# Altium PCB PCB robot V3.PCBDOC (part 1 of 3)
Units mm, origin at the board's own origin, x right, y up, seen from the top; angles counter-clockwise.
Board outline 299.72 x 199.9 mm, 2 copper layers (Top Layer, Bottom Layer); 127 components, 116 nets, 527 pads, 274 vias.
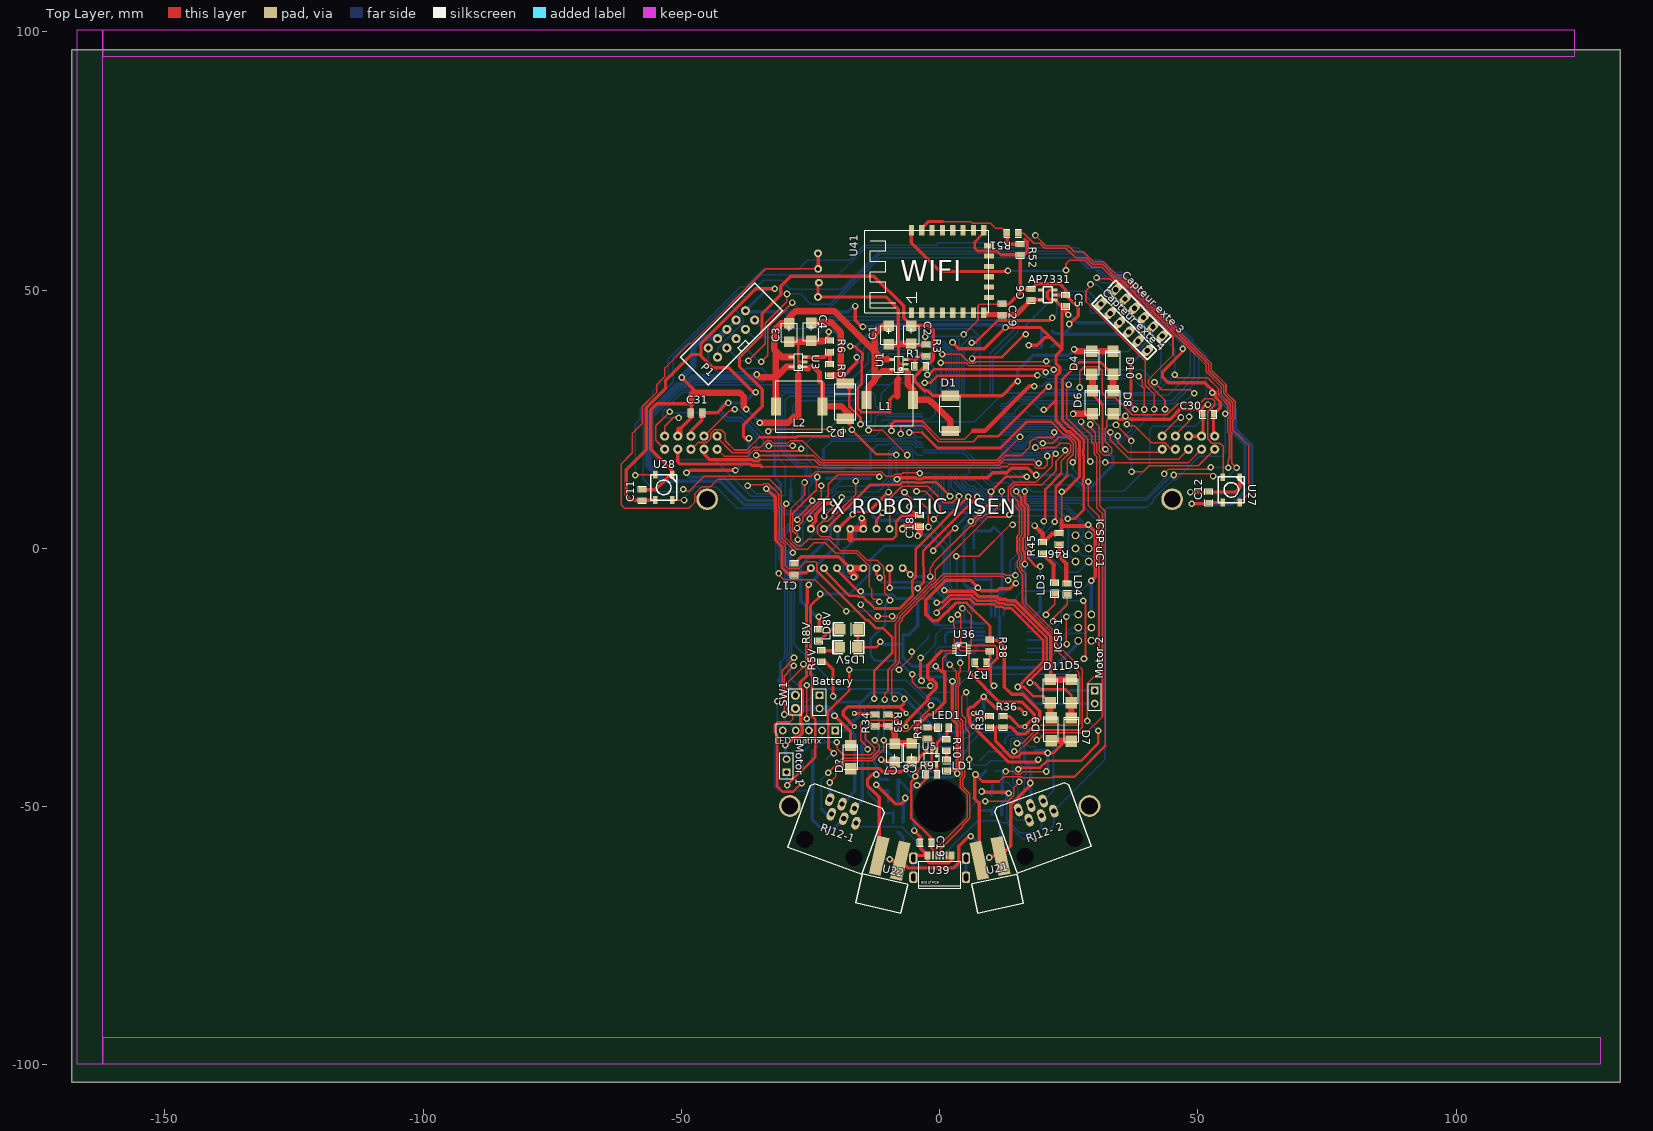
[diagram p0: Top Layer view]
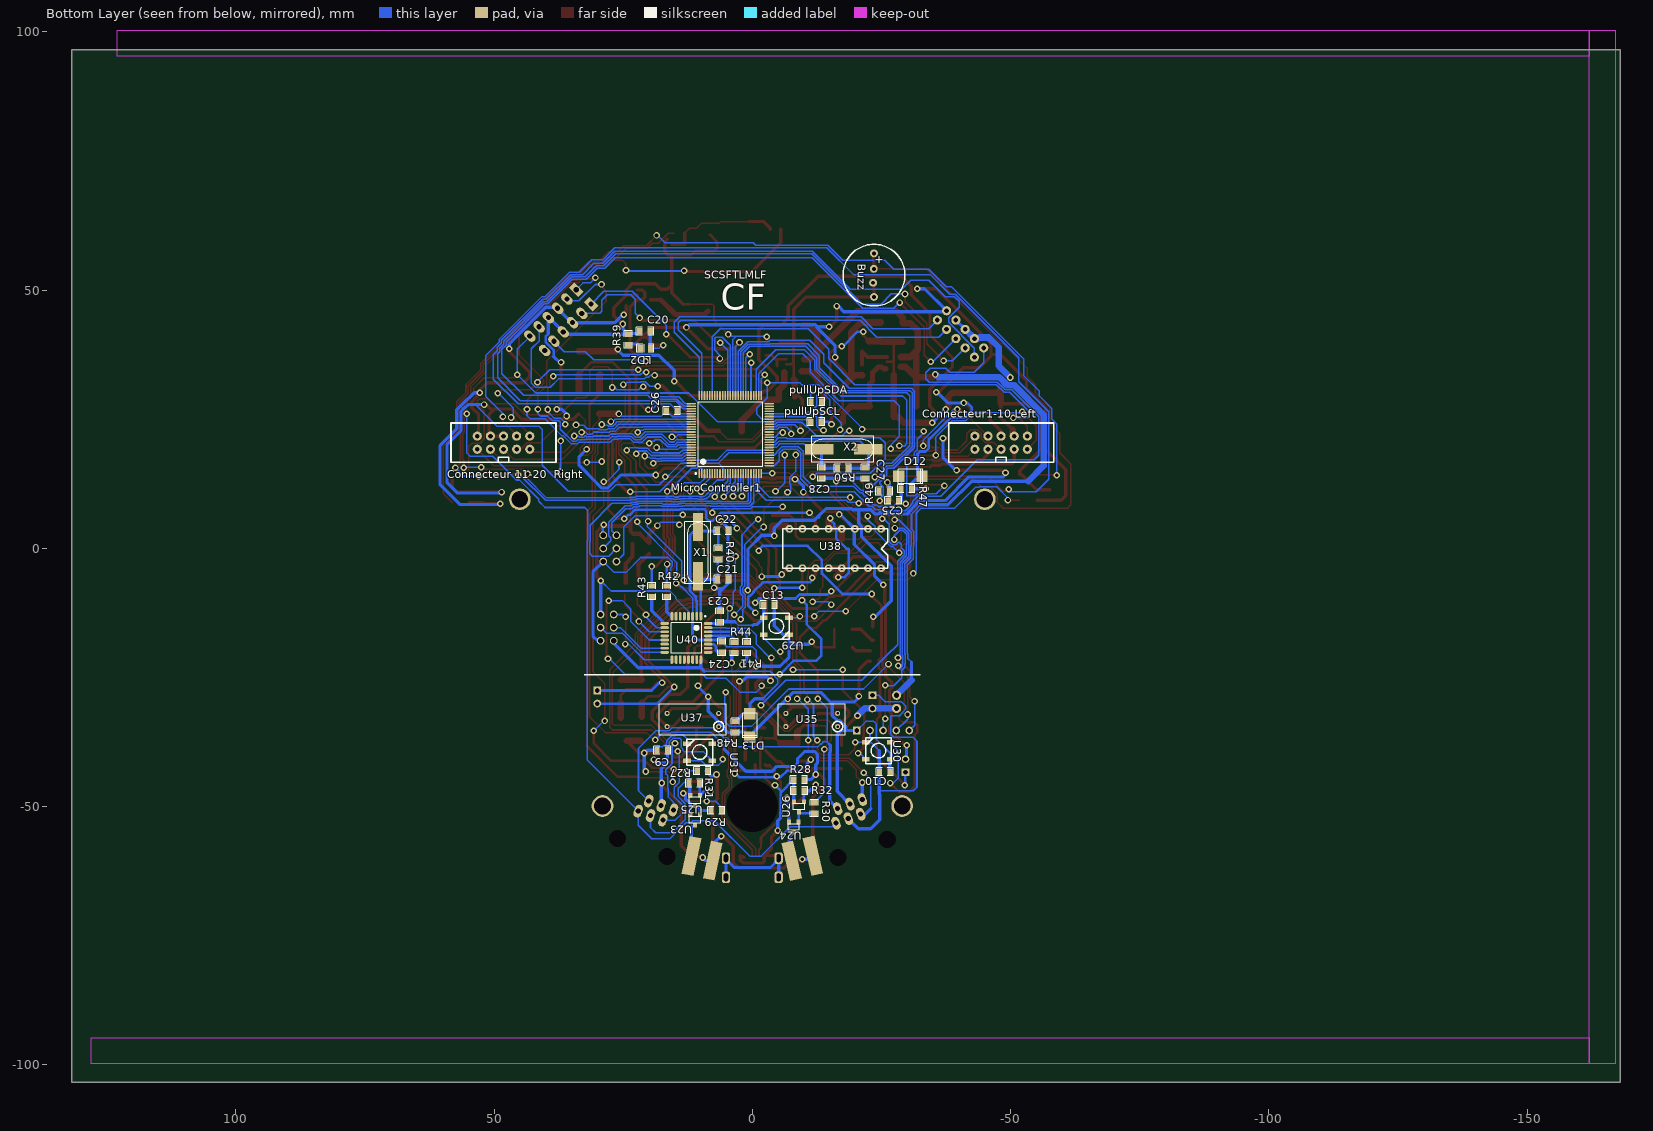
[diagram p1: Bottom Layer view, seen from below]

## Layer stack, top to bottom
Top Solder: solder mask 0.0102, Solder Resist, Dk 3.5
Top Layer: signal copper 0.0356
Dielectric1: dielectric 0.32, FR-4, Dk 4.8
Bottom Layer: signal copper 0.0356
Bottom Solder: solder mask 0.0102, Solder Resist, Dk 3.5

## Board outline
-167.997,-103.403 131.723,-103.403 131.723,96.495 -167.997,96.495

## Design rules (kind name [scope] priority, off if disabled: settings)
Clearance Clearance_bottom_polygon [OnLayer('Bottom Layer') Or OnLayer('Multi-Layer') vs OnLayer('Bottom Layer')  And  InPoly] p1: gap=0.508
Clearance Clearance_top_polygon [OnLayer('Top Layer')  Or OnLayer('Multi-Layer') vs OnLayer('Top Layer') And InPoly] p2: gap=0.508
Clearance Clearance_bottom [OnLayer('Bottom Layer') Or OnLayer('Multi-Layer') vs OnLayer('Bottom Layer')  And Not InPoly] p3: gap=0.19
Clearance Clearance_top [OnLayer('Top Layer')  Or OnLayer('Multi-Layer') vs OnLayer('Top Layer') And Not InPoly] p4: gap=0.192
Clearance Clearance_pad_to_pad [OnLayer('Multi-Layer') vs OnLayer('Multi-Layer')] p5: gap=0.254
ComponentClearance ComponentClearance_bottom [OnLayer('Bottom Overlay') vs OnLayer('Bottom Overlay')] p1: gap=0 collisioncheckmode=3 verticalgap=0.254 showdistances=FALSE
ComponentClearance ComponentClearance_top [OnLayer('Top Overlay') vs OnLayer('Top Overlay')] p2: gap=0 collisioncheckmode=3 verticalgap=0.254 showdistances=FALSE
DiffPairsRouting [All] p1: maxlimit=0.254 minlimit=0.1 mostfreqgap=0.254 toplayer_minwidth=0.381 toplayer_maxwidth=0.381 toplayer_prefwidth=0.381 bottomlayer_minwidth=0.381 bottomlayer_maxwidth=0.381 bottomlayer_prefwidth=0.381 maxuncoupledlength=12.7
FabricationTestPointUsage TestPointUsage [All] p1: valid=0 allowmultiple=FALSE
FabricationTestpoint Testpoint [All] p1: side=3 testpointundercomponent=TRUE minsize=1.016 maxsize=2.54 preferedsize=1.524 minholesize=0 maxholesize=1.016 preferedholesize=0.813 testpointgrid=0.025 allowsidetop=TRUE allowsidebottom=TRUE usegrid=TRUE gridtolerance=0
HoleSize [All] p1: absolutevalues=TRUE maxlimit=25.4 minlimit=0.406 maxpercent=80.000 minpercent=20.000
MinimumAnnularRing [PadXSize_AllLayers = PadYSize_AllLayers] p1: minimumring=0.203
PermittedLayers [All] p1: toplayerpermitted=TRUE bottomlayerpermitted=TRUE
PolygonConnect [All] p1: connectstyle=Relief reliefconductorwidth=0.61 reliefentries=4 polygonreliefangle="90 Angle" airgapwidth=0.254
RoutingVias [All] p1: holewidth=0.406 width=0.813 viastyle="Through Hole" minholewidth=0.4 minwidth=0.8 maxholewidth=0.6 maxwidth=10
SMDToPlane [All] p1: distance=0
SolderMaskExpansion [All] p1: expansion=0.102
ViasUnderSMD [All] p1: allowed=FALSE
Width Width_botom_top [OnLayer('Bottom Layer') or OnLayer('Top Layer')] p1: maxlimit=254 minlimit=0.254 preferedwidth=0.813 minimp=50.000000 maximp=50.000000 favimp=50.000000
24 further rules are at their usual default settings.

## Classes and differential pairs
component class "MKbloc Connector": "Capteur exte 3" "Capteur exte 4" RJ12-1 RJ12-2
component class "Line driver connector": C30 C31 Connecteur1-10 "Connecteur1-10 Left" "Connecteur 11-20  Right"
component class TXRobot-Boutons: ButtonCo1 P1
component class "Sound Connector": Buzz
component class "LED Matrix connector": "LED matrix"
component class "IA Core": C19 C20 C21 C22 C23 C24 C25 C26 C27 C28 D12 D13 "ICSP 1" "ICSP uC1" LD2 LD3 LD4 MicroController1 pullUpSCL pullUpSDA R39 R40 R41 R42 R43 R44 R45 R46 R47 R48 R49 R50 U39 U40 X1 X2
component class "CarteTxCapteurDistance 2": Analog C9 C10 C11 C12 C13 Digital infrared1 infrared2 infrared3 infrared4 infrared5 infrared6 "Infrared 1" LedRgbWs2812b1 LedRgbWs2812b2 LedRgbWs2812b3 LedRgbWs2812b4 LedRgbWs2812b5 LedRgbWs2812b6 LedRgbWs2812b7 LedRgbWs2812b8 LedRgbWs2812b9 LedRgbWs2812b10 Q1 Q2 Q3 Q4 Q5 Q6 Q7 Q8 Q9 Q10 Q11 R27 R28 R29 R30 R31 R32 U22 U23 U24 U25 U26 U27 U28 U29 U30 U31
component class "Alim sch projet robot": AP7331 Battery C1 C2 C3 C4 C5 C6 D1 D2 D? L1 L2 LD5V LD8V R1 R3 R5 R5V R6 R8V "REG 5V" "REG 8V" SW1 U1 U3
component class "Schema chargeur USB projet robot": C7 C8 LD1 LED1 R9 R10 R11 U5
component class CarteTxMoteur: C17 C18 D4 D5 D6 D7 D8 D9 D10 D11 "Motor 1" "Motor 2" R33 R34 R35 R36 R37 R38 U35 U36 U37 U38
component class "Wi fi connector": C29 R51 R52 U41

## Components (designator, comment, footprint, x,y, rotation, side; value= is the part's Value field where it differs from the comment)
AP7331 "AP7331" AP7331 20.901,49.047 r90 top (schematic designator "AP7331 voltage regulator")
Battery "Header 2" HDR1X2 -23.256,-28.46 r270 top (schematic designator "Battery pins1")
Buzz "BuzzerChinois" BuzzerChinois -23.551,52.885 r270 bottom
C1 "CAP_POL" 293D/B -9.843,43.074 r270 top
C2 "CAP_POL" 293D/B -5.478,43.119 r270 top
C3 "CAP_POL" 293D/B -29.114,43.569 r270 top
C4 "CAP_POL" 293D/B -24.894,43.709 r270 top
C5 "CAP" 0805 24.399,46.938 r90 top
C6 "CAP" 0805 17.737,50.133 r270 top
C7 "CAP_POL" 293D/B -8.728,-41.37 r90 top
C8 "CAP_POL" 293D/B -5.439,-41.321 r90 top
C9 "CAP" 0805 16.432,-39.095 r0 bottom
C10 "CAP" 0805 -26.633,-43.257 r0 bottom
C11 "CAP" 0805 -57.57,9.32 r90 top
C12 "CAP" 0805 52.08,8.855 r90 top
C13 "CAP" 0805 -2.197,-10.927 r180 bottom
C17 "CAP" 0805 -28.15,-2.987 r270 top
C18 "CAP" 0805 -3.83,4.32 r90 top
C19 "CAP" 0805 -3.726,-56.951 r0 top
C20 "CAP" 0805 19.761,42.053 r0 bottom
C21 "CAP" 0805 6.719,-5.983 r180 bottom
C22 "CAP" 0805 6.719,3.361 r180 bottom
C23 "CAP" 0805 6.28,-12.19 r270 bottom
C24 "CAP" 0805 5.915,-18.081 r270 bottom
C25 "CAP" 0805 -28.336,9.249 r0 bottom
C26 "CAP" 0805 14.56,26.621 r0 bottom
C27 "CAP" 0805 -21.895,15.604 r270 bottom
C28 "CAP" 0805 -13.403,15.604 r270 bottom
C29 "CAP" 0805 12.108,45.239 r90 top
C30 "CAP" 0805 52.987,25.919 r180 top
C31 "CAP" 0805 -46.04,26.25 r180 top
"Capteur exte 3" "headers6" Headers6 38.579,45.571 r45 top
"Capteur exte 4" "headers6" Headers6 35.702,42.788 r45 top
"Connecteur1-10 Left" "comment" HE10-10V -43.08,19.18 r90 bottom locked
"Connecteur 11-20  Right" "comment" HE10-10V 53.24,19.18 r90 bottom locked
D1 "SS32" "Schottly Diode SS32 footprint" 2.007,29.524 r0 top
D2 "SS32" "Schottly Diode SS32 footprint" -18.28,31.893 r0 top
D4 "DiodeRedresseuse" "Diode MULTICOMP SS16" 29.47,35.93 r90 top
D5 "DiodeRedresseuse" "Diode MULTICOMP SS16" 25.44,-27.655 r90 top
D6 "DiodeRedresseuse" "Diode MULTICOMP SS16" 29.58,28.27 r90 top
D7 "DiodeRedresseuse" "Diode MULTICOMP SS16" 25.505,-35.09 r90 top
D8 "DiodeRedresseuse" "Diode MULTICOMP SS16" 33.58,28.27 r90 top
D9 "DiodeRedresseuse" "Diode MULTICOMP SS16" 21.59,-35.015 r90 top
D10 "DiodeRedresseuse" "Diode MULTICOMP SS16" 33.545,35.915 r90 top
D11 "DiodeRedresseuse" "Diode MULTICOMP SS16" 21.44,-27.655 r90 top
D12 "DiodeRedresseuse" "Diode MULTICOMP SS16" -30.61,13.945 r180 bottom
D13 "DiodeRedresseuse" "Diode MULTICOMP SS16" 0.461,-34.306 r270 bottom
D? "DiodeRedresseuse" "Diode MULTICOMP SS16" -17.257,-40.426 r90 top
"ICSP 1" "ISCP Arduino" "Prog Arduino" 26.821,-12.806 r0 top
"ICSP uC1" "ISCP Arduino" "Prog Arduino" 26.307,2.519 r0 top
L1 "IND" 1050 -14.152,28.727 r90 top
L2 "IND" 1050 -31.698,27.479 r90 top
LD1 "comment" LED0805 1.375,-40.939 r270 top
LD2 "Yellow" LED0805 21.71,38.765 r180 bottom
LD3 "Yellow" LED0805 22.255,-8.798 r90 top
LD4 "Yellow" LED0805 24.659,-8.9 r90 top
LD5V "comment" LED1206 -15.958,-19.15 r180 top
LD8V "comment" LED1206 -15.851,-15.642 r180 top
LED1 "comment" LED0805 -0.369,-34.694 r0 top
"LED matrix" "Header 5" HDR1X5 -20.236,-35.259 r180 top (schematic designator "To LED Matrix1")
MicroController1 "ATmega2560-16AU" 100A_N 4.255,22.022 r90 bottom
"Motor 1" "Header 2" HDR1X2 -29.65,-43.35 r90 top
"Motor 2" "Header 2" HDR1X2 30.001,-27.514 r270 top
P1 "comment" HE10-10V -43,37 r135 top
pullUpSCL "RES" 0805 -13.341,24.526 r0 bottom
pullUpSDA "RES" 0805 -13.409,28.362 r0 bottom
R1 "RES" 0805 -4.783,35.301 r0 top
R3 "RES" 0805 -2.604,39.376 r270 top
R5 "RES" 0805 -21.258,35.564 r270 top
R5V "RES" 0805 -22.869,-19.806 r270 top
R6 "RES" 0805 -21.308,40.129 r270 top
R8V "RES" 0805 -23.407,-17.791 r90 top
R9 "RES" 0805 -0.594,-43.695 r180 top
R10 "RES" 0805 1.319,-39.082 r90 top
R11 "RES" 0805 -2.394,-34.751 r270 top
R27 "RES" 0805 8.648,-43.069 r0 bottom
R28 "RES" 0805 -10.038,-44.766 r0 bottom
R29 "RES" 0805 5.966,-50.75 r0 bottom
R30 "RES" 0805 -11.991,-49.275 r270 bottom
R31 "RES" 0805 12.268,-45.453 r180 bottom
R32 "RES" 0805 -8.04,-46.951 r180 bottom
R33 "RES" 0805 -9.98,-34.28 r90 top
R34 "RES" 0805 -12.475,-34.28 r90 top
R35 "RES" 0805 9.665,-34.605 r90 top
R36 "RES" 0805 12.33,-34.6 r90 top
R37 "RES" 0805 8.94,-22.095 r180 top
R38 "RES" 0805 9.738,-17.771 r270 top
R39 "RES" 0805 23.995,39.405 r90 bottom
R40 "RES" 0805 6.595,-2.053 r90 bottom
R41 "RES" 0805 1.1,-18.159 r270 bottom
R42 "RES" 0805 16.567,-9.328 r90 bottom
R43 "RES" 0805 19.46,-9.328 r90 bottom
R44 "RES" 0805 3.527,-20.193 r90 bottom
R45 "RES" 0805 19.951,-0.927 r90 top
R46 "RES" 0805 23.17,0.848 r90 top
R47 "RES" 0805 -28.807,11.498 r180 bottom
R48 "RES" 0805 3.268,-33.54 r270 bottom
R49 "RES" 0805 -24.516,11.057 r180 bottom
R50 "RES" 0805 -16.515,15.477 r180 bottom
R51 "RES" 0805 15.119,61.018 r180 top
R52 "RES" 0805 15.601,58.85 r270 top
RJ12-1 "RJ12_1" RJ12_Femelle_FCI -21.351,-58.081 r340 top (schematic designator "Capteur exte 1")
"RJ12- 2" "RJ12_FCI_Femelle" RJ12_Femelle_FCI 21.281,-57.919 r20 top (schematic designator "Capteur exte 2")
SW1 "allumage" JMP2-100 -27.927,-30.986 r90 top
U1 "LM2731" "LM2731 footprint" -6.553,34.679 r270 top
U3 "LM2731" "LM2731 footprint" -26.043,35.134 r270 top
U5 "MCP73831" MCP73831 -0.589,-39.063 r180 top
U21 "infrared" Infrared 9.72,-60 r192 top
U22 "infrared" Infrared -9.671,-60 r167 top
U23 "Transistors" BC817-40 11.074,-52.6 r180 bottom
U24 "Transistors" BC817-40 -8.027,-53.988 r180 bottom
U25 "Transistors" BC817-40 11.064,-48.82 r180 bottom
U26 "Transistors" BC817-40 -9.045,-50.049 r180 bottom
U27 "LedRgbWs2812b" LedRgbWs2812b 56.45,11.315 r90 top
U28 "LedRgbWs2812b" LedRgbWs2812b -53.425,11.79 r90 top
U29 "LedRgbWs2812b" LedRgbWs2812b -4.657,-15.072 r180 bottom
U30 "LedRgbWs2812b" LedRgbWs2812b -24.422,-39.165 r0 bottom
U31 "LedRgbWs2812b" LedRgbWs2812b 10.185,-39.462 r0 bottom
U35 "ITR9608" "ITR9608 footprint" -11.5,-33.2 r0 bottom locked
U36 "MCP6002" MCP6002 2.78,-18.81 r0 top
U37 "ITR9608" "ITR9608 footprint" 11.5,-33.2 r0 bottom locked
U38 "L293NE" L293NE -24.94,-3.845 r270 bottom
U39 "USB microB" "USB micro B connector" 0,-62.782 r0 top
U40 "ATmega16U2-AU" 32A_N 12.758,-17.345 r270 bottom
U41 "ESP8266MOD" "ESP8266MOD Footprint" -5.462,45.58 r90 top
X1 "16MHz" HC-49S-SMD 10.509,-5.38 r90 bottom
X2 "16MHz" HC-49S-SMD -12.973,19.158 r180 bottom

## Footprints (in the part's own frame and the unit in brackets; to place one, negate y for a bottom-side part, rotate by r counter-clockwise, add the part's x,y. Pads: shape width x height; smd on the part's side, far side on the other; paste and mask are expansions set on the pad)
32A_N [mm] "Thin QFP, 32-Leads, Body 7x7mm, Pitch 0.8mm, IPC Medium Density"
  oval 1.65x0.55 smd: 1(-4.2,2.8) 2(-4.2,2) 3(-4.2,1.2) 4(-4.2,0.4) 5(-4.2,-0.4) 6(-4.2,-1.2) 7(-4.2,-2) 8(-4.2,-2.8) 17(4.2,-2.8) 18(4.2,-2) 19(4.2,-1.2) 20(4.2,-0.4) 21(4.2,0.4) 22(4.2,1.2) 23(4.2,2) 24(4.2,2.8)
  oval 0.55x1.65 smd: 9(-2.8,-4.2) 10(-2,-4.2) 11(-1.2,-4.2) 12(-0.4,-4.2) 13(0.4,-4.2) 14(1.2,-4.2) 15(2,-4.2) 16(2.8,-4.2) 25(2.8,4.2) 26(2,4.2) 27(1.2,4.2) 28(0.4,4.2) 29(-0.4,4.2) 30(-1.2,4.2) 31(-2,4.2) 32(-2.8,4.2)
  silkscreen extent -4.32,-2.95 2.95,3.75, body extent -3.5,-3.5 3.5,3.5, height 1.2
100A_N [mm] "Thin QFP, 100-Leads, Body 14x14mm, Pitch 0.5mm, IPC Medium Density"
  oval 1.8x0.3 smd: 1(-7.55,6) 2(-7.55,5.5) 3(-7.55,5) 4(-7.55,4.5) 5(-7.55,4) 6(-7.55,3.5) 7(-7.55,3) 8(-7.55,2.5) 9(-7.55,2) 10(-7.55,1.5) 11(-7.55,1) 12(-7.55,0.5) 13(-7.55,0) 14(-7.55,-0.5) 15(-7.55,-1) 16(-7.55,-1.5) 17(-7.55,-2) 18(-7.55,-2.5) 19(-7.55,-3) 20(-7.55,-3.5) 21(-7.55,-4) 22(-7.55,-4.5) 23(-7.55,-5) 24(-7.55,-5.5) 25(-7.55,-6) 51(7.55,-6) 52(7.55,-5.5) 53(7.55,-5) 54(7.55,-4.5) 55(7.55,-4) 56(7.55,-3.5) 57(7.55,-3) 58(7.55,-2.5) 59(7.55,-2) 60(7.55,-1.5) 61(7.55,-1) 62(7.55,-0.5) 63(7.55,0) 64(7.55,0.5) 65(7.55,1) 66(7.55,1.5) 67(7.55,2) 68(7.55,2.5) 69(7.55,3) 70(7.55,3.5) 71(7.55,4) 72(7.55,4.5) 73(7.55,5) 74(7.55,5.5) 75(7.55,6)
  oval 0.3x1.8 smd: 26(-6,-7.55) 27(-5.5,-7.55) 28(-5,-7.55) 29(-4.5,-7.55) 30(-4,-7.55) 31(-3.5,-7.55) 32(-3,-7.55) 33(-2.5,-7.55) 34(-2,-7.55) 35(-1.5,-7.55) 36(-1,-7.55) 37(-0.5,-7.55) 38(0,-7.55) 39(0.5,-7.55) 40(1,-7.55) 41(1.5,-7.55) 42(2,-7.55) 43(2.5,-7.55) 44(3,-7.55) 45(3.5,-7.55) 46(4,-7.55) 47(4.5,-7.55) 48(5,-7.55) 49(5.5,-7.55) 50(6,-7.55) 76(6,7.55) 77(5.5,7.55) 78(5,7.55) 79(4.5,7.55) 80(4,7.55) 81(3.5,7.55) 82(3,7.55) 83(2.5,7.55) 84(2,7.55) 85(1.5,7.55) 86(1,7.55) 87(0.5,7.55) 88(0,7.55) 89(-0.5,7.55) 90(-1,7.55) 91(-1.5,7.55) 92(-2,7.55) 93(-2.5,7.55) 94(-3,7.55) 95(-3.5,7.55) 96(-4,7.55) 97(-4.5,7.55) 98(-5,7.55) 99(-5.5,7.55) 100(-6,7.55)
  silkscreen extent -7.67,-6.25 6.25,6.83, body extent -7,-7 7,7, height 1.2
293D/B [mil]
  rect 80x80 smd: 1(0,0) 2(140,0)
  silkscreen extent 0,-60 140,60
0805 [mil]
  rect 40x50 smd: 1(0,0) 2(80,0)
  silkscreen extent -25,-30 105,30
1050 [mm]
  rect 3.5x2 smd paste+0 mask+1: 1(0,0) 2(0,-9)
  silkscreen extent -5,-9 5,0
AP7331 [mm]
  rect 0.6x1.1 smd: 1(-0.95,-1.35) 2(0,-1.35) 3(0.95,-1.35) 4(0.95,1.35) 5(-0.95,1.35)
  silkscreen extent -1.55,-0.85 1.55,0.85
BC817-40 [mm]
  rect 0.8x0.9 smd: 1(0.95,1) 2(-0.95,1) 3(0,-1)
  silkscreen extent -1.1,-0.6 1.1,0.6
BuzzerChinois [mil]
  round 60 hole 31.5: 0(-166.14,0)
  round 60 hole 30: 1(166.14,0)
  silkscreen extent -235,-235 235,235
"Diode MULTICOMP SS16" [mm]
  rect 2.2x2.21 smd: 1(-2.25,0) 2(2.25,0)
  silkscreen extent -2.37,-1.4 2.37,1.4
"ESP8266MOD Footprint" [mm]
  rect 2x1 smd paste+0 mask+0.05: 1(0,0) 2(0,-2) 3(0,-4) 4(0,-6) 5(0,-8) 6(0,-10) 7(0,-12) 8(0,-14) 15(16,-14) 16(16,-12) 17(16,-10) 18(16,-8) 19(16,-6) 20(16,-4) 21(16,-2) 22(16,0)
  rect 1x2 smd paste+0 mask+0.05: 9(3,-15) 10(5,-15) 11(7,-15) 12(9,-15) 13(11,-15) 14(13,-15)
  silkscreen extent 0,-15 16,9
HC-49S-SMD [mm] "SMD quartz crystal"
  rect 5.5x2 smd: 1(0,0) 2(9.5,0)
  silkscreen extent -1.5,-2.48 10.5,2.52
HDR1X2 [mm] "Connector; Header; 2 Position"
  rect 1.5x1.5 hole 0.9: 1(0,0)
  round 1.5 hole 0.9: 2(2.54,0)
  silkscreen extent -1.27,-1.27 3.81,1.27
HDR1X5 [mm] "Connector; Header; 5 Position"
  rect 1.5x1.5 hole 0.9: 1(0,0)
  round 1.5 hole 0.9: 2(2.54,0) 3(5.08,0) 4(7.62,0) 5(10.16,0)
  silkscreen extent -1.27,-1.27 11.43,1.27
HE10-10V [mil]
  round 70 hole 36: 1(0,0) 2(100,0) 3(0,-100) 4(100,-100) 5(0,-200) 6(100,-200) 7(0,-300) 8(100,-300) 9(0,-400) 10(100,-400)
  silkscreen extent -100,-600 200,200
Headers6 [mm]
  rect 2.524x1.524 hole 1: 1(0,6.35)
  oval 2.524x1.524 hole 1: 2(0,3.81) 3(0,1.27) 4(0,-1.27) 5(0,-3.81) 6(0,-6.35)
  silkscreen extent -1.27,-7.62 1.27,7.62
Infrared [mm]
  rect 2.3x7.5 smd far side: gndEmitter(-2.1,0) VCC(2.1,0)
  rect 2.3x7.5 smd: gndReceiver(2.1,0) VCC(-2.1,0)
  silkscreen extent -4.5,4.1 4.5,9.9
"ITR9608 footprint" [mm]
  round 1 hole 0.5 paste+0 mask+0.05: 1(-5,1.3) 2(-5,-1.24) 3(5,-1.24) 4(5,1.3)
  silkscreen extent -6.5,-3 6.5,3
JMP2-100 [mil]
  round 70 hole 40: 1(0,0) 2(100,0)
  silkscreen extent -50,-50 150,50
L293NE [mil]
  round 60 hole 30: 1(-300,0) 2(-300,-100) 3(-300,-200) 4(-300,-300) 5(-300,-400) 6(-300,-500) 7(-300,-600) 8(-300,-700) 9(0,0) 10(0,-100) 11(0,-200) 12(0,-300) 13(0,-400) 14(0,-500) 15(0,-600) 16(0,-700)
  silkscreen extent -300,-750 0,50
LED0805 [mil]
  rect 40x50 smd: A(80,0) K(0,0)
  silkscreen extent -25,-30 105,30
LED1206 [mil]
  rect 80x80 smd: A(135,0) K(0,0)
  silkscreen extent -50,-50 185,50
LedRgbWs2812b [mm]
  rect 1.5x0.9 smd: din(2.45,1.65) dout(-2.45,-1.65) GND(2.45,-1.65) VCC(-2.45,1.65)
  silkscreen extent -2.5,-2.5 2.5,2.5
"LM2731 footprint" [mm]
  rect 0.55x1 smd paste+0 mask+0.05: 1(0,0) 2(-0.95,0) 3(-1.9,0) 4(-1.9,-2.7) 5(0,-2.7)
  silkscreen extent -2.54,-2.16 0.64,-0.51
MCP6002 [mm]
  rect 0.75x0.3 smd paste+0 mask+0.05: 1(0,0) 2(0,-0.5) 3(0,-1) 4(0,-1.5) 5(2.9,-1.5) 6(2.9,-1) 7(2.9,-0.5) 8(2.9,0)
  silkscreen extent 0.4,-1.9 2.5,0.5
MCP73831 [mm]
  rect 0.6x1.1 smd paste+0 mask+0.05: 1(0,0) 2(0.95,0) 3(1.9,0) 4(1.9,2.8) 5(0,2.8)
  silkscreen extent -0.51,0.63 2.41,2.16
"Prog Arduino" [mm]
  round 1.5 hole 1 paste+0 mask+0.05: 1(0,0) 2(2.54,0) 3(0,-2.54) 4(2.54,-2.54) 5(0,-5.08) 6(2.54,-5.08)
RJ12_Femelle_FCI [mm]
  oval 1.524x2.524 hole 1: 1(-3.17,8.89) 2(-1.91,6.35) 3(-0.63,8.89) 4(0.63,6.35) 5(1.91,8.89) 6(3.17,6.35)
  round 0 hole 3.3: ""(-5.08,0) ""(5.08,0)
  silkscreen extent -7.62,-2.54 7.62,10.8
"Schottly Diode SS32 footprint" [mm]
  rect 3.39x1.96 smd paste+0 mask+0.05: 1(0,0) 2(0,-6.81)
  silkscreen extent -2,-7 2,0
"USB micro B connector" [mm]
  rect 0.4x1.5 smd paste+0 mask+0.05: 1(-1.3,3.302) 2(-0.65,3.302) 3(0,3.302) 4(0.65,3.302) 5(1.3,3.302)
  rrect50% 1.6x2.2 hole 0.8 slot 1.5 at 90 deg paste+0 mask+0.05: 6(-5.1,2.794) 7(-5.1,-0.906) 8(5.1,-0.906) 9(5.1,2.794)
  rect 1.15x1.5 smd paste+0 mask+0.05: 10(-2.325,3.302) 11(2.325,3.302)
  silkscreen extent -4.08,-3.05 4.04,2.16

## Part data
Battery "Motor 1" "Motor 2": "Header, 2-Pin"
C1 C2 C3 C4 C7 C8: "capacité polarisée"
C5 C6 C9 C10 C11 C12 C13 C17 C18 C19 C20 C21 C22 C23 C24 C25 C26 C27 C28 C29 C30 C31: "capacité non polarisée"
"Connecteur1-10 Left" "Connecteur 11-20  Right" P1: library part HE10-10, "10-pin connector"
D1 D2: "Schottky Diode 20V 3A"
"ICSP 1" "ICSP uC1": "Programmation Port For Arduino"
L1 L2: library part "Shielded inductor", "Shielded Inductor 1050"
LD1 LD2 LD3 LD4 LD5V LD8V LED1: library part LED, "LED 5mm/3mm/CMS"
"LED matrix": "Header, 5-Pin"
MicroController1: "8-bit AVR Microcontroller, 4.5-5.5V, 256KB Flash, 4KB EEPROM, 8KB SRAM, 86 GPIO pins, 100-pin TQFP, Industrial Grade (-40°C to 85°C), Pb-Free"
pullUpSCL pullUpSDA R1 R3 R5 R5V R6 R8V R9 R10 R11 R27 R28 R29 R30 R31 R32 R33 R34 R35 R36 R37 R38 R39 R40 R41 R42 R43 R44 R45 R46 R47 R48 R49 R50 R51 R52: "resistance"
RJ12-1: library part RJ12_FCI_Femelle
SW1: library part JUMPER2, "cavalier 1 position"
U1 U3: "Boost switch regulator DCDC"
U5: "Voltage regulator for Li-po or li-ion battery, USB compatible"
U21 U22: library part RPR-359F
U23 U24 U25 U26: "NPN transistor"
U35 U37: "Intersection sensor"
U36: "Double Operational Amplifier"
U39: "Usb female connector SMD micro B"
U40: "8-bit AVR Microcontroller, 2.7-5.5V, 16KB Flash, 512 Bytes EEPROM, 512 Bytes SRAM, 32-pin TQFP, Industrial Grade (-40°C to 85°C)"
U41: "Wi fi ESP"
X1 X2: library part XTAL, "Quartz"

## Free pads (board coordinates)
  round 1.524 hole 0.762: 0(-23.515,54.103) 1(-23.389,51.405)
  round 4.2 hole 3.2: ""(-45,9.5) ""(-29,-49.88) ""(29,-49.88) ""(45,9.5)
  round 0 hole 10: ""(0,-49.88)

## Via types
v1: diameter 1.27, hole 0.711, Top Layer to Bottom Layer, 274 vias

## Nets (pads, with @x,y where several pads share a name; then routed paths per layer and width w, separated by ;. In a path a pad name is that pad's centre, name@x,y a point inside that pad or via, vN(x,y) a via of type N, cw(c..) or ccw(c..) an arc to the next point about the centre after c; other vN are vias at no path point)
BATTERY: C1.1 C3.1 L1.1 L2.1 SW1.2 U1.4 U1.5 U3.4 U3.5 | length 174.6
  Top Layer w1.27: v1(-35.432,33.656) -34.876,33.099 -31.698,33.099 ; L2.1@-31.698,27.479 -31.698,33.099 ; U3.5@-28.743,35.134 -29.664,35.134 -31.698,33.099 ; U3.4@-28.743,37.034 -30.583,37.034 -31.381,37.832 ; L1.1@-13.867,29.012 -13.867,31.194 -12.558,32.502 -12.558,32.814 ; -10.048,36.579 -11.053,36.579 -12.558,38.084 ; C1.1@-9.843,43.074 -10.938,43.074 -12.558,41.454 -12.558,38.084 ; -9.558,34.309 -9.598,34.269 -11.103,34.269 -12.558,32.814 ; -31.698,33.099 -31.698,37.514 -31.381,37.832 ; -31.381,37.832 -32.063,38.514 -32.063,42.144 -30.639,43.569 C3.1@-29.114,43.569 -29.114,44.699 -27.92,45.892 -20.366,45.892 -12.558,38.084 ; -12.558,32.814 -12.558,38.084
  Bottom Layer w0.305: -32.551,8.42 -31.928,7.797 -31.928,7.727 -30.821,6.62 -30.821,3.708 -31.219,3.31 -31.219,0.299 -31.181,0.261 -31.181,-2.017 -29.979,-3.22 -29.979,-20.345 -30.063,-20.429 -30.063,-21.262 -30.821,-22.019
  Bottom Layer w0.635: -53.413,12.99 -42.444,12.99 -37.874,8.42 -32.551,8.42 ; -30.821,-25.552 -30.821,-22.019
  Bottom Layer w1.27: -53.413,12.99 -56.392,15.969 -56.392,25.873 -50.659,31.606 -49.325,31.606 -47.831,33.1 -35.989,33.1 v1@-35.559,33.53 ; -30.821,-25.552 SW1.2@-27.927,-28.446
"BATTERY PIN": C8.1 D?.1 U5.3 | length 16.9
  Top Layer w0.635: D?.1@-17.257,-42.676 -17.215,-42.634 -11.602,-42.634 -11.122,-43.114 -11.122,-43.252 -11.1,-43.275 -7.393,-43.275 C8.1@-5.439,-41.321 -4.747,-41.321 U5.3@-2.489,-39.063
"BATTERY PIN +": Battery.2 D?.2 SW1.1 | length 15.3
  Top Layer w0.635: v1@-20.405,-32.383 v1(-20.359,-32.383) -17.257,-35.486 D?.2@-17.257,-38.176
  Bottom Layer w1.27: SW1.1@-27.927,-30.986 -23.27,-30.986 Battery.2@-23.256,-31 -21.742,-31 v1(-20.359,-32.383)
D+: R44.1 U39.3 | length 43.5
  Top Layer w0.254: U39.3@0,-59.48 0,-58.353 4.467,-53.886 4.467,-53.638 5.816,-52.289 5.816,-47.471 4.467,-46.122 4.467,-44.572 4.849,-44.19 4.849,-42.988 4.532,-42.67 4.532,-35.09 4.467,-35.025 4.467,-33.505 3.587,-32.625 3.587,-26.677 3.926,-26.337 3.926,-25.136 3.7,-24.909 3.7,-24.199 3.981,-23.918 v1(3.981,-22.182)
  Bottom Layer w0.635: R44.1@3.527,-20.193 3.981,-20.647 v1(3.981,-22.182)
D-: R41.2 U39.2 | length 43.9
  Top Layer w0.305: U39.2@-0.65,-59.48 -0.65,-58.104 3.995,-53.458 3.995,-53.443 5.344,-52.094 5.344,-47.666 3.995,-46.317 3.995,-44.377 4.378,-43.995 4.378,-43.183 4.06,-42.866 4.06,-35.285 3.995,-35.22 3.995,-33.7 3.115,-32.82 3.115,-26.482 3.455,-26.142 3.455,-25.331 3.229,-25.105 3.229,-23.832 v1@2.065,-22.668
  Bottom Layer w0.635: R41.2@1.1,-20.191 1.1,-21.655 v1(1.945,-22.5)
DTR: C25.2 R49.2 U40.13 | length 130.8
  Top Layer w0.305: v1(-26.157,12.755) -26.157,10.319 -28.872,7.604 -28.872,6.181 -28.958,6.095 -28.958,4.914 -28.872,4.828 -28.872,4.68 -29.038,4.514 -29.038,3.334 -28.872,3.168 -28.872,1.721 -27.683,0.532 -26.684,0.532 -25.436,1.78 -21.462,1.78 -19.216,-0.466 -15.891,-0.466 -14.067,-2.291 -12.127,-2.291 -10.806,-3.612 -10.806,-5.148 -10.645,-5.309 -10.645,-7.187 -10.664,-7.206 -10.664,-8.591 -9.481,-9.774 v1@-9.481,-9.961 ; v1(-5.326,-24.384) -5.326,-25.865 -4.199,-26.993 -2.212,-26.993 v1(-1.794,-26.575) ; v1(27.775,-10.177) 28.226,-10.628 28.226,-21.096 v1(27.935,-21.387)
  Bottom Layer w0.305: v1@-9.623,-10.059 v1(-9.623,-10.022) ; v1@-1.743,-26.915 -0.827,-27.832 2.394,-27.832 5.096,-25.13 8.883,-25.13 9.624,-24.389 24.653,-24.389 27.656,-21.387 v1(27.935,-21.387) ; U40.13@16.958,-17.745 19.942,-17.745 23.557,-14.129 23.557,-11.673 25.053,-10.177 v1@27.615,-10.177
  Bottom Layer w0.5: v1(-9.623,-10.022) -10.509,-10.909 -10.509,-14.697 -13.377,-17.564 -13.377,-20.754 -12.346,-21.785 -7.926,-21.785 v1(-5.326,-24.384)
  Bottom Layer w0.635: C25.2@-26.631,9.07 -26.631,9.205 C25.2@-26.605,9.231 ; C25.2@-26.581,9.588 R49.2@-26.581,10.778 ; R49.2@-26.548,11.057 -26.548,12.364 v1(-26.157,12.755)
"ENABLE 1": MicroController1.23 U38.1 | length 31.8
  Top Layer w0.635: U38.1@-24.94,3.775 -24.94,4.295 -23.989,5.245 -23.989,6.596 -21.875,8.711 v1(-20.585,8.711)
  Bottom Layer w0.254: v1(-20.585,8.711) -20.395,8.901 -18.582,8.901 -18.202,9.28 -2.695,9.28 -0.745,11.23 MicroController1.23@-0.745,14.472
  Bottom Layer w0.508: v1@-20.585,8.515 v1(-20.585,8.711)
"ENABLE 2": MicroController1.5 U38.16 | length 35.7
  Top Layer w0.305: v1(-1.859,-5.463) -1.859,-3.841 -1.376,-3.358 -1.376,-3.005 5.909,4.28 6.439,4.28 7.013,4.853 7.013,5.229 7.709,5.925 8.185,5.925 8.82,6.56 9.865,6.56 12.027,8.723 v1(12.027,11.009) ; v1@-1.807,-5.527 v1@-1.807,-5.463
  Top Layer w0.508: U38.16@-7.16,-3.845 -6.924,-3.845 v1(-5.7,-5.068)
  Bottom Layer w0.305: MicroController1.5@8.255,13.817 MicroController1.5@8.255,14.472 8.26,14.467 8.26,13.517 9.542,12.235 10.492,12.235 11.718,11.009 v1(12.027,11.009)
  Bottom Layer w0.508: v1@-5.646,-5.463 v1(-1.859,-5.463)
GND: "Capteur exte 3.4" "Capteur exte 4.4" "Connecteur1-10 Left.8" "Connecteur 11-20  Right.4" "Connecteur 11-20  Right.6" "ICSP 1.6" "ICSP uC1.6" "LED matrix.2" "RJ12- 2.4" AP7331.2 Battery.1 Buzz.1 C1.2 C2.2 C3.2 C4.2 C5.2 C6.1 C7.2 C8.2 C9.2 C10.2 C11.2 C12.2 C13.2 C17.1 C18.2 C19.1 C20.2 C21.2 C22.2 C23.1 C24.1 C26.2 C27.2 C28.2 C29.2 C30.2 C31.2 D6.1 D7.1 D8.1 D9.1 LD5V.K LD8V.K MicroController1.11 MicroController1.32 MicroController1.62 MicroController1.81 MicroController1.98 MicroController1.99 P1.4 P1.6 P1.8 pad.1 R3.1 R6.1 R9.2 R11.2 R27.2 R28.2 R31.1 R32.1 R33.1 R34.1 R35.1 R36.1 R38.1 R39.2 R49.1 R52.2 RJ12-1.4 U1.2 U3.2 U5.2 U25.2 U26.2 U27.GND U28.GND U29.GND U30.GND U31.GND U36.4 U38.4 U38.5 U38.12 U38.13 U39.5 U39.6 U39.7 U39.8 U39.9 U39.10 U39.11 U40.3 U40.28 U41.15 | length 1068.9
  Top Layer w0.305: v1@-19.828,-37.523 -19.828,-38.823 -18.687,-39.963 -13.356,-39.963 -12.613,-39.22 -12.613,-38.623 -14.363,-36.872 -14.363,-34.697 -14.032,-34.365 -12.561,-34.365 R34.1@-12.475,-34.28 ; -17.32,1.733 -20.713,1.733 -21.256,2.277 -23.042,2.277 -23.647,2.882 -23.647,4.256 -22.64,5.264 -21.665,5.264 -20.258,6.671 -20,6.671 -16.252,10.418 v1(-16.252,13.026) ; R3.1@-2.768,39.547 v1(-2.768,40.953) ; 0.965,-23.915 0.61,-23.56 0.61,-21.29 1.59,-20.31 U36.4@2.78,-20.31 ; v1(4.667,41.408) 7.42,44.16 7.42,46.988 7.703,47.271 C29.2@12.108,47.271 ; v1(12.771,-43.192) 14.285,-43.192 14.826,-43.732 15.638,-43.732 16.134,-43.236 v1@20.297,-43.236 ; D6.1@29.58,26.02 29.58,24.917 30.892,23.604 30.892,18.884 31.795,17.982 32.752,17.982 33.339,18.568 33.339,19.397 32.069,20.666 32.069,23.126 32.309,23.365 32.309,24.749 D8.1@33.58,26.02
  Top Layer w0.508: -27.414,33.619 -27.414,36.414 ; -27.414,40.013 -27.414,36.414 ; U3.2@-26.043,36.084 -27.083,36.084 -27.414,36.414 ; -22.538,40.129 -21.415,41.252 ; -17.32,1.733 -9.161,1.733 -8.377,2.518 -8.377,5.242 -7.268,6.352 C18.2@-4.384,6.352 ; v1(-17.304,39.114) -16.373,39.114 -14.94,37.681 -14.94,36.42 -15.059,36.301 -15.059,31.9 -15.877,31.081 -15.877,27.071 -15.149,26.343 -9.67,26.343 ; LD5V.K@-15.958,-19.15 -12.321,-19.15 -11.251,-18.079 v1(-11.508,-18.079) ; LD5V.K@-15.851,-19.044 LD8V.K@-15.851,-15.642 ; -8.013,32.724 -8.013,39.518 ; -7.933,39.518 -7.933,36.054 -7.508,35.629 U1.2@-6.553,35.629 ; v1@-5.803,7.771 C18.2@-4.384,6.352 ; C8.2@-5.439,-37.765 -5.108,-37.434 -4.457,-36.783 R11.2@-2.394,-36.783 ; v1(-4.387,-45.852) -3.81,-45.852 -2.626,-44.668 R9.2@-2.626,-43.695 -1.539,-42.608 U5.2@-1.539,-39.063 ; C18.2@-3.83,6.352 C18.2@-4.384,6.352 ; 3.068,-10.637 3.153,-10.552 5.228,-10.552 9.738,-15.062 R38.1@9.738,-17.771 ; v1(6.034,5.259) 6.034,5.095 9.931,8.992 v1(9.931,10.99) 12.798,13.857 v1(16.845,13.857) ; U41.15@8.233,60.727 6.823,59.316 6.823,58.092 7.349,57.566 11.104,57.566 11.852,56.818 ; C29.2@12.108,47.271 13.377,47.271
  Top Layer w0.635: C11.2@-57.57,11.352 -55.012,11.352 -52.124,14.24 U28.GND@-51.775,14.24 -51.775,15.007 -55.959,19.191 -55.959,26.826 -54.81,27.975 -48.072,27.975 C31.2@-48.072,26.25 -48.072,25.235 -50.39,22.916 ; v1(-49.93,33.069) -47.018,30.156 ; C17.1@-28.15,-2.987 -26.788,-1.625 -19.54,-1.625 U38.12@-17.32,-3.845 ; pad.1@-23.175,51.481 -23.551,51.481 Buzz.1@-23.551,48.665 -10.395,48.665 -8.013,46.284 -8.013,39.518 ; -17.32,2.84 U38.4@-17.32,3.775 ; R34.1@-12.475,-34.28 R33.1@-9.98,-34.28 -8.915,-35.345 ; -9.67,26.343 -9.67,28.797 -8.978,29.489 -8.193,29.489 ; C8.2@-5.439,-37.434 C8.2@-5.108,-37.434 ; C2.2@-5.291,39.376 R3.1@-2.604,39.376 ; U39.6@-5.1,-59.988 -4.592,-59.48 U39.10@-2.325,-59.48 ; v1@-4.809,-54.736 -3.726,-55.819 C19.1@-3.726,-56.951 -3.726,-58.079 U39.10@-2.325,-59.48 ; C8.2@-4.457,-36.783 -4.457,-34.472 -2.165,-32.18 -1.4,-32.18 0.965,-29.815 0.965,-23.915 0.357,-23.915 v1@-0.479,-23.079 ; -1.719,-36.642 -1.539,-36.822 U5.2@-1.539,-39.063 ; 1.615,-59.784 1.695,-59.784 1.781,-59.698 U39.11@2.325,-59.698 ; U39.11@2.325,-59.48 U39.11@2.325,-59.698 ; 3.068,-10.637 -0.337,-14.042 -1.358,-14.042 -2.539,-12.861 -2.704,-12.861 -2.704,-10.078 -0.292,-7.666 -0.292,-7.628 1.154,-6.182 5.975,-6.182 8.03,-8.237 11.137,-8.237 11.554,-7.82 13.586,-7.82 v1@14.436,-6.97 ; R35.1@9.665,-34.605 10.811,-34.605 ; R38.1@9.738,-17.771 11.107,-17.771 12.474,-19.138 12.474,-26.878 12.548,-26.878 13.913,-28.243 16.053,-28.243 19.35,-31.54 19.35,-33.139 16.53,-35.959 15.221,-35.959 13.862,-34.6 R36.1@12.33,-34.6 ; 11.852,56.818 R52.2@15.601,56.818 ; R36.1@12.325,-34.605 10.811,-34.605 ; 13.377,47.271 15.601,49.495 15.601,51.005 ; v1@14.723,-6.777 v1(14.761,-6.777) ; 16.447,59.868 16.968,59.346 16.968,57.386 16.4,56.818 R52.2@15.601,56.818 ; AP7331.2@22.251,49.047 C5.2@23.939,49.047 ; 23.214,51.191 24.399,50.006 C5.2@24.399,48.97 26.808,46.561 26.808,45.041 v1@25.208,43.442 ; 23.303,51.191 18.795,51.191 C6.1@17.737,50.133 16.472,50.133 15.601,51.005 ; 24.336,-37.265 21.978,-39.622 v1(20.913,-39.622) 15.91,-39.622 15.121,-40.412 13.934,-40.412 13.922,-40.399 13.87,-40.399 10.811,-37.341 10.811,-34.605 ; D8.1@33.58,26.02 33.611,26.02 34.642,24.988 35.567,24.988 35.724,25.146 36.673,25.146 36.83,24.988 44.601,24.988 46.588,26.976 49.898,26.976 ; v1(37.022,36.013) 37.022,27.748 v1(37.827,26.943) ; 48.16,21.72 50.7,21.72 50.955,21.975 C30.2@50.955,25.919 49.898,26.976 ; v1@48.552,10.887 C12.2@52.08,10.887 57.252,10.887 58.1,11.735 U27.GND@58.1,13.765 ; v1@51.639,27.873 50.742,26.976 49.898,26.976 ; U39.10@-2.325,-59.48 -2.325,-60.61 -2.031,-60.903 1.793,-60.903 2.325,-60.371 U39.11@2.325,-59.698 ; 15.601,51.005 R52.2@15.601,56.818
  Top Layer w1.27: -50.7,21.72 -50.39,22.03 -50.39,22.916 ; -48.072,27.975 -48.072,29.667 -47.583,30.156 -47.018,30.156 -38.77,30.156 -37.951,29.336 -37.951,27.422 ; v1(-34.837,24.308) -29.347,24.308 -28.194,25.461 -27.414,25.461 -27.414,33.619 ; C3.2@-29.114,40.013 -27.414,40.013 C4.2@-25.034,40.013 ; C4.2@-24.87,40.129 -22.538,40.129 ; -17.32,1.733 -17.32,2.84 ; U38.4@-17.32,3.775 U38.5@-14.78,3.775 -14.78,5.385 v1@-14.985,5.59 ; v1@-16.218,-5.539 -17.32,-4.438 U38.12@-17.32,-3.845 U38.13@-14.78,-3.845 ; C1.2@-9.843,39.518 -8.013,39.518 ; -8.915,-35.345 -8.728,-35.532 C7.2@-8.728,-37.814 -8.678,-37.765 C8.2@-5.439,-37.765 ; -8.193,29.489 -8.193,32.544 -8.013,32.724 ; -7.933,39.518 C2.2@-5.523,39.518 ; D9.1@21.59,-37.265 24.336,-37.265 ; v1@25.828,26.02 D6.1@29.58,26.02
  Bottom Layer w0.305: -24.601,-46.952 -31.157,-46.952 -31.876,-46.233 -31.876,-37.366 -31.104,-36.594 -27.388,-36.594 -26.764,-35.97 -26.764,-32.568 -26.903,-32.429 -28.537,-32.429 -29.075,-31.891 -29.075,-31.769 -29.722,-31.122 -29.722,-30.508 -28.896,-29.682 -25.683,-29.682 -24.461,-28.46 Battery.1@-23.256,-28.46 Battery.1@-22.811,-28.905 ; -24.601,-39.185 -23.064,-37.648 -22.105,-37.648 U30.GND@-21.972,-37.515 ; R49.1@-24.516,11.057 -21.575,11.057 -21.366,11.266 -21.05,11.266 -18.744,13.572 -18.713,13.572 ; -22.776,-35.259 -22.776,-36.71 U30.GND@-21.972,-37.515 ; v1(-19.934,-37.523) -21.964,-37.523 U30.GND@-21.972,-37.515 ; v1(-5.854,8.059) -0.088,8.059 0.281,7.691 7.598,7.691 v1@7.796,7.492 ; MicroController1.32@-3.295,19.022 4.881,19.022 6.881,17.022 MicroController1.98@11.805,17.022 MicroController1.99@11.805,16.522 13.052,16.522 13.141,16.433 13.884,16.433 17.989,12.328 26.399,12.328 27.667,11.06 35.635,11.06 40.661,16.085 40.661,22.991 41.28,23.61 49.422,23.61 53.638,27.826 ; v1@-2.27,41.089 3.102,41.089 ; v1(-0.764,-22.85) -0.764,-19.791 -0.046,-19.073 4.923,-19.073 C24.1@5.915,-18.081 ; MicroController1.62@3.755,29.572 3.755,40.436 3.102,41.089 ; v1@4.761,41.641 4.208,41.089 3.102,41.089 ; MicroController1.11@5.255,14.472 5.255,13.521 5.55,13.226 6.796,13.226 8.634,11.388 9.532,11.388 v1(9.931,10.99) ; R27.2@10.68,-43.069 12.186,-43.069 v1@12.268,-43.151 ; U40.3@11.558,-13.145 11.558,-9.562 13.664,-7.456 13.825,-7.456 14.115,-7.166 14.115,-7.005 14.932,-6.188 15.065,-6.188 15.817,-5.436 15.817,-3.75 15.523,-3.456 15.523,-3.181 15.492,-3.149 15.492,-2.589 16.312,-1.769 21.575,-1.769 24.467,-4.662 26.746,-4.662 28.847,-2.561 ; MicroController1.81@11.805,25.522 15.492,25.522 C26.2@16.592,26.621 17.676,25.537 25.345,25.537 v1(25.819,26.011) ; U31.GND@12.635,-37.812 12.635,-36.882 13.443,-36.074 14.755,-36.074 14.95,-36.269 15.575,-36.269 16.541,-37.236 16.541,-37.861 16.798,-38.118 17.082,-38.118 17.409,-38.445 18.601,-38.445 ; 12.781,-45.287 13.12,-45.287 14.363,-46.53 14.363,-48.041 12.966,-49.438 12.966,-52.506 15.519,-55.059 18.683,-55.059 19.701,-54.041 19.701,-51.737 19.701,-50.632
  Bottom Layer w0.508: v1(-21.492,41.93) -20.407,41.93 v1@-17.448,38.971 ; v1(-16.666,-5.59) -17.862,-5.59 -18.654,-4.798 -18.654,-3.074 -18.673,-3.056 -18.639,-0.062 -18.212,-0.062 -16.248,1.902 -16.248,3.857 -15.859,4.246 -15.859,4.776 -15.075,5.56 v1(-15.075,5.831) ; R28.2@-8.006,-44.766 -5.508,-47.265 ; -5.508,-51.099 -5.508,-47.265 ; v1(-4.387,-45.852) -5.508,-46.973 -5.508,-47.265 ; 38.416,37.086 38.416,38.471 38.568,38.471 40.019,39.922 40.019,40.974 39.477,41.515
  Bottom Layer w0.635: P1.6@-41.204,42.388 P1.8@-39.408,44.184 ; v1(-37.453,26.898) -34.863,24.308 v1(-34.837,24.308) ; -24.655,-47.645 -24.655,-52.533 -22.895,-54.294 -20.552,-54.294 RJ12-1.4@-18.587,-52.329 ; -24.601,-47.591 -24.601,-46.952 C10.2@-24.601,-43.257 -24.601,-39.185 ; C27.2@-21.895,13.572 -18.744,13.572 ; -18.713,13.572 C28.2@-13.403,13.572 ; v1@-11.105,-18.482 -10.994,-18.594 -7.107,-18.594 ; U26.2@-8.04,-48.994 R32.1@-8.04,-46.951 R28.2@-8.04,-44.799 ; -5.508,-51.099 -5.508,-52.161 -4.942,-52.726 v1(-4.942,-54.629) ; U39.7@-5.1,-63.906 U39.7@-5.1,-63.688 -5.1,-60.206 -3.521,-61.785 3.521,-61.785 5.1,-60.206 U39.8@5.1,-63.906 ; C13.2@-4.229,-10.927 -4.229,-15 -5.951,-16.722 U29.GND@-7.107,-16.722 -7.107,-18.594 ; v1(-0.764,-22.85) -5.36,-22.85 -7.107,-21.103 -7.107,-18.594 ; C24.1@5.915,-18.081 6.251,-17.745 U40.28@8.558,-17.745 10.805,-17.745 11.558,-16.992 U40.3@11.558,-13.145 ; v1(6.034,5.259) 4.687,3.913 C22.2@4.687,3.361 C21.2@4.687,-5.983 4.687,-6.806 5.718,-7.837 ; C23.1@6.28,-12.19 6.28,-8.399 5.718,-7.837 ; v1(7.409,-7.637) 7.209,-7.837 5.718,-7.837 ; U25.2@12.118,-47.517 12.105,-47.504 12.105,-45.616 R31.1@12.268,-45.453 v1@12.268,-43.151 ; C9.2@18.464,-39.095 20.386,-39.095 v1(20.913,-39.622) 20.913,-42.897 v1(20.608,-43.202) ; C20.2@21.793,42.053 22.261,41.585 R39.2@23.761,41.585 ; v1(25.063,43.423) 25.063,42.505 R39.2@23.995,41.437 36.146,41.437 36.6,41.89 39.325,44.615 39.454,44.615 ; 28.847,-2.561 30.848,-4.562 30.848,-16.985 29.947,-17.886 29.361,-17.886 ; v1@35.819,25.356 35.819,25.864 36.899,26.943 v1(37.827,26.943) ; v1@37.206,35.876 38.416,37.086 ; 39.477,41.515 39.477,44.673 ; v1@48.758,10.729 57.115,10.729 59.09,12.703 59.09,20.108 56.393,22.804 56.393,26.498 55.724,27.167 55.678,27.167 55.019,27.826 53.638,27.826 v1(51.925,27.826)
  Bottom Layer w1.27: v1(-49.93,33.069) -47.694,35.305 -47.694,38.907 -45.788,40.813 -43.905,40.813 -43.683,40.592 P1.4@-43,40.592 P1.6@-41.204,42.388
  other v1: 7.779,6.904 48.543,10.895 35.962,25.613
MISO: "ICSP uC1.1" MicroController1.22 | length 37.8
  Bottom Layer w0.254: MicroController1.22@-0.245,14.472 -0.245,8.88 0.475,8.16 6.262,8.16 6.341,8.239 6.459,8.239 6.538,8.16 8.062,8.16 8.141,8.239 8.752,8.239 8.779,8.211 13.16,8.211 13.187,8.239 13.44,8.239 13.538,8.14 14.167,8.14 14.185,8.123 17.49,8.123 17.606,8.239 21.819,8.239 22.016,8.042 22.962,8.042 23.297,7.708 24.481,7.708 27.21,4.978 27.21,3.375 26.354,2.519 26.307,2.519
"MISO 16": "ICSP 1.1" U40.17 | length 18
  Top Layer w0.305: v1(24.535,-13.266) 24.535,-18.459 v1(24.61,-18.534)
  Bottom Layer w0.305: U40.17@15.558,-21.545 20.938,-21.545 v1@24.35,-18.132 ; v1(24.535,-13.266) 24.994,-12.806 26.821,-12.806